# EAGLE board mapleCUx_large_047 (EAGLE 7.3.0)
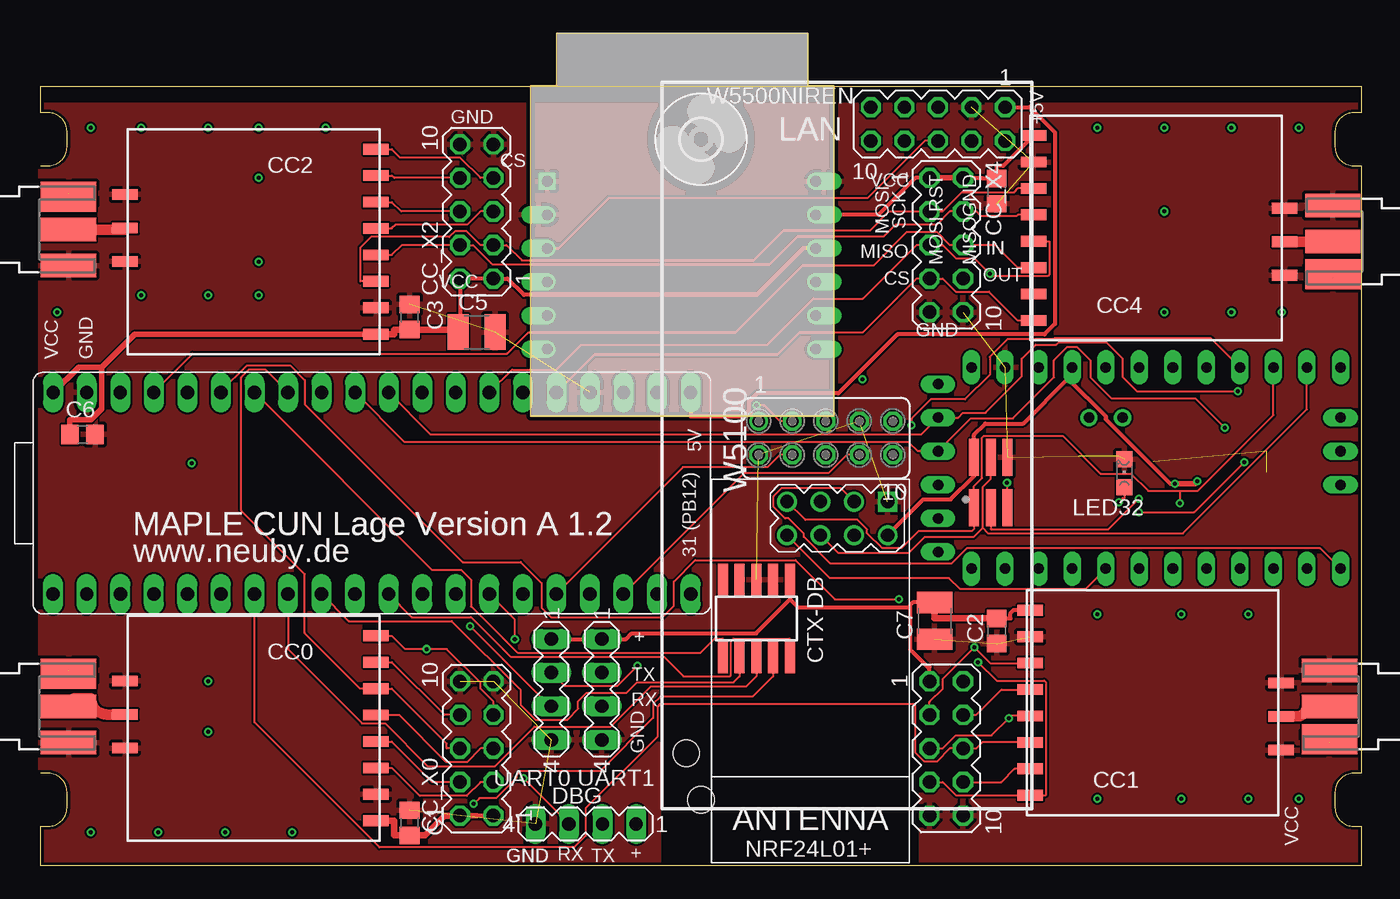
[diagram p0: board, top side]
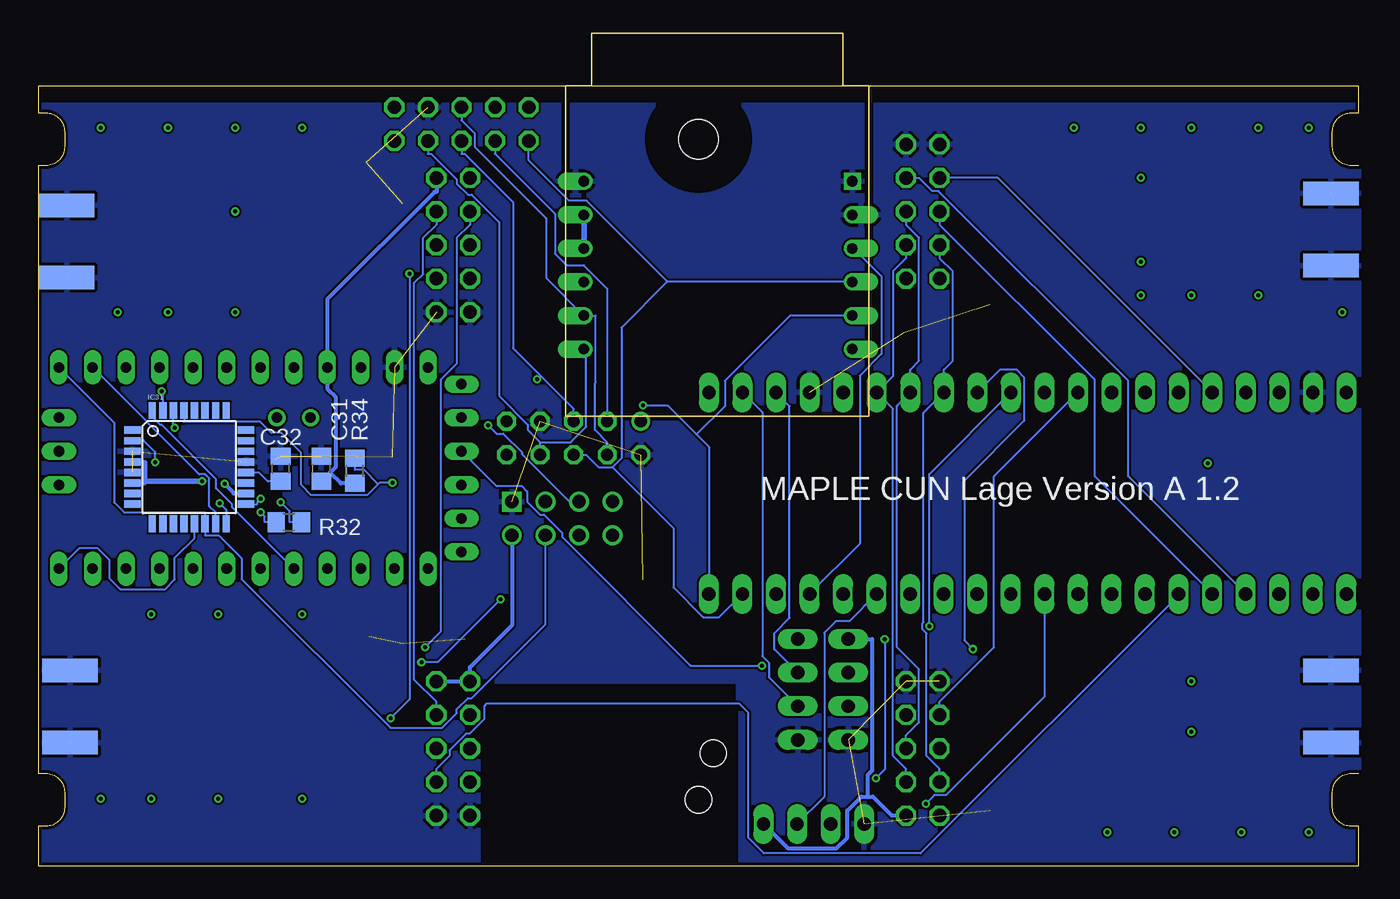
[diagram p1: board, bottom side, seen from below]

Size 100 x 63.04 mm. Coordinates in mm from the lower left corner, seen from the top.
Outline: 0,7 0.59,7 arc-90 2,5.59 2,4.41 arc-90 0.59,3 0,3 0,0 100,0 100,3 99.41,3 arc-90 98,4.41 98,5.59 arc-90 99.41,7 100,7 100,53 99.41,53 arc-90 98,54.41 98,55.59 arc-90 99.41,57 100,57 100,59 0,59 0,57 0.59,57 arc-90 2,55.59 2,54.41 arc-90 0.59,53 0,53
Copper layers (1*16): Top 0.035mm / dielectric 1.5mm / Bottom 0.035mm
Design rules "SeeedStudio_2layer_DRU_no_angle_20140221": minimum track width 6mil, minimum drill 12mil, track to track 6mil, track to pad 6mil, pad to pad 6mil, via to via 6mil, smd to smd 0mil, copper to edge 10mil, drill to drill 10mil, minimum pad ring 10mil, minimum via ring 6mil, stop-mask expansion 2mil, vias tented up to drill 100mil, thermal gap 10mil
Net classes: 1 PWR: width 0.508 mm
Holes 2 mm at 48.9,8.53 50,5
tRestrict: area 0,58 to 100,59; area 47,0 to 66,12
bRestrict: area 0,58 to 100,59; area 0,58 to 100,59; area 47,0 to 66,12

## Footprints (pad centres in the part's own frame; a part is rotated, then mirrored left to right if it is on the bottom)
C0805 = smd 1.3 x 1.5: 1 -0.95,0; 2 0.95,0
C1210 = smd 1.6 x 2.7: 1 -1.4,0; 2 1.4,0
CC1101_MODULE1_SMD = smd 1.93 x 0.813: ANT 19,5.96; CSN 0,0; GDO0 0,2; GDO2 0,4; GND@0 0,12; GND@1 19,8.5; GND@2 19,3.42; MISO 0,6; MOSI 0,10; SCLK 0,8; VCC 0,14
MA05-2 = drill 1.016 octagon: 1 -5.08,-1.27; 2 -5.08,1.27; 3 -2.54,-1.27; 4 -2.54,1.27; 5 0,-1.27; 6 0,1.27; 7 2.54,-1.27; 8 2.54,1.27; 9 5.08,-1.27; 10 5.08,1.27
1365-10 = smd 0.76 x 2.4: 1 -2.54,-2.95; 2 -2.54,2.95; 3 -1.27,-2.95; 4 -1.27,2.95; 5 0,-2.95; 6 0,2.95; 7 1.27,-2.95; 8 1.27,2.95; 9 2.54,-2.95; 10 2.54,2.95
MA04-1 = drill 1.016 long: 1 -3.81,0; 2 -1.27,0; 3 1.27,0; 4 3.81,0
3,0 = hole 3: 0,0
TQFP32-08 = smd 1.27 x 0.559: 1 -4.293,2.8; 2 -4.293,2; 3 -4.293,1.2; 4 -4.293,0.4; 5 -4.293,-0.4; 6 -4.293,-1.2; 7 -4.293,-2; 8 -4.293,-2.8; 17 4.293,-2.8; 18 4.293,-2; 19 4.293,-1.2; 20 4.293,-0.4; 21 4.293,0.4; 22 4.293,1.2; 23 4.293,2; 24 4.293,2.8 | smd 0.559 x 1.27: 9 -2.8,-4.293; 10 -2,-4.293; 11 -1.2,-4.293; 12 -0.4,-4.293; 13 0.4,-4.293; 14 1.2,-4.293; 15 2,-4.293; 16 2.8,-4.293; 25 2.8,4.293; 26 2,4.293; 27 1.2,4.293; 28 0.4,4.293; 29 -0.4,4.293; 30 -1.2,4.293; 31 -2,4.293; 32 -2.8,4.293
CHIPLED_0805 = smd 1.2 x 1.2: A 0,-1.05; C 0,1.05
WIRELESS-NRF24L01 = drill 1 square: 1 -12.7,6.35 | drill 1: 2 -10.16,6.35; 3 -12.7,3.81; 4 -10.16,3.81; 5 -12.7,1.27; 6 -10.16,1.27; 7 -12.7,-1.27; 8 -10.16,-1.27
R0805 = smd 1.3 x 1.5: 1 -0.95,0; 2 0.95,0
20-DIP = drill 1.016 pad 1.27 long: 1 -24.13,-7.62; 2 -21.59,-7.62; 3 -19.05,-7.62; 4 -16.51,-7.62; 5 -13.97,-7.62; 6 -11.43,-7.62; 7 -8.89,-7.62; 8 -6.35,-7.62; 9 -3.81,-7.62; 10 -1.27,-7.62; 11 1.27,-7.62; 12 3.81,-7.62; 13 6.35,-7.62; 14 8.89,-7.62; 15 11.43,-7.62; 16 13.97,-7.62; 17 16.51,-7.62; 18 19.05,-7.62; 19 21.59,-7.62; 20 24.13,-7.62 | drill 1 pad 1.27 long: 21 24.13,7.62; 22 21.59,7.62; 23 19.05,7.62; 24 16.51,7.62; 25 13.97,7.62; 26 11.43,7.62; 27 8.89,7.62; 28 6.35,7.62; 29 3.81,7.62; 30 1.27,7.62; 31 -1.27,7.62; 32 -3.81,7.62; 33 -6.35,7.62; 34 -8.89,7.62; 35 -11.43,7.62; 36 -13.97,7.62; 37 -16.51,7.62; 38 -19.05,7.62; 39 -21.59,7.62; 40 -24.13,7.62
ABK-PRO-MINI = drill 0.8 long: A0 10.16,-3.81; A1 10.16,-6.35; A2 10.16,-8.89; A3 10.16,-11.43; A6 3.81,-21.59; A7 6.35,-21.59; D2 -5.08,-3.81; D3 -5.08,-6.35; D4 -5.08,-8.89; D5 -5.08,-11.43; D6 -5.08,-13.97; D7 -5.08,-16.51; D8 -5.08,-19.05; D9 -5.08,-21.59; D10 10.16,-21.59; D11 10.16,-19.05; D12 10.16,-16.51; D13 10.16,-13.97; DTR 8.89,8.89; GND 10.16,3.81; GND1 -5.08,-1.27; GND2 -3.81,8.89; GND3 -1.27,8.89; GND4 1.27,-21.59; RAW 10.16,6.35; RST 10.16,1.27; RST1 -5.08,1.27; RX1 -5.08,3.81; RX1-1 3.81,8.89; TX0 -5.08,6.35; TX0-1 6.35,8.89; VCC 10.16,-1.27; VCC1 1.27,8.89 | drill 0.8: A4 6.35,-5.08; A5 6.35,-2.54
USR-ES1 = drill 0.8 square: GND 1.27,17.78 | drill 0.8 offset: GND2 1.27,15.24; GND3 21.59,17.78; MISO 21.59,5.08; MOSI 1.27,12.7; NINT 1.27,5.08; NRESET 21.59,7.62; NSS 1.27,7.62; PWDN 21.59,10.16; SCLK 1.27,10.16; VIN3.3 21.59,15.24; VIN3.3B 21.59,12.7
FE05-2 = drill 0.914: 1 -5.08,1.27 | drill 0.914 octagon: 2 -5.08,-1.27; 3 -2.54,1.27; 4 -2.54,-1.27; 5 0,1.27; 6 0,-1.27; 7 2.54,1.27; 8 2.54,-1.27; 9 5.08,1.27; 10 5.08,-1.27
SMA = smd 4.191 x 1.778: 1 2.115,0; GND@1 2.115,2.733; GND@2 2.115,-2.733 | smd 4.191 x 1.778 bottom: GND@3 2.115,2.733; GND@4 2.115,-2.733 | smd 4.191 x 2.286: P$3 2.108,2.489
2X03-1.27MM_SMD = smd 0.75 x 2.8: P$1 -1.27,-1.905; P$2 -1.27,1.905; P$3 0,-1.905; P$4 0,1.905; P$5 1.27,-1.905; P$6 1.27,1.905

## Placement (x,y rotation side)
C1  22pF  [C0805]  27.94,3.25 270 top
C2  22pF  [C0805]  72.39,17.78 90 top
C3  22pF  [C0805]  27.94,41.55 270 top
C4  22pF  [C0805]  72.39,51.07 90 top
C5  10uF  [C1210]  33.02,40.4 0 top
C6  22pF  [C0805]  3.17,32.66 0 top
C7  4,7  [C1210]  67.69,18.54 90 top
C31  100n  [C0805]  78.56,30.06 90 bottom
C32  100n  [C0805]  81.64,30.06 90 bottom
CC0  CC1101_MODULE1SMD  [CC1101_MODULE1_SMD]  25.4,17.41 180 top
CC1  CC1101_MODULE1SMD  [CC1101_MODULE1_SMD]  74.93,5.35 0 top
CC2  CC1101_MODULE1SMD  [CC1101_MODULE1_SMD]  25.4,54.24 180 top
CC4  CC1101_MODULE1SMD  [CC1101_MODULE1_SMD]  75.18,41.27 0 top
CC_X0  [MA05-2]  33.02,8.89 90 top
CC_X1  [MA05-2]  68.58,8.89 270 top
CC_X2  [MA05-2]  33.02,49.53 90 top
CC_X4  [MA05-2]  68.58,46.99 270 top
CTX-DB  1365-10  [1365-10]  54.19,18.73 180 top
DBG  [MA04-1]  41.27,3.17 180 top
H6  MOUNT-HOLE3.0  [3,0]  50,55 0 top
IC31  ATMEGA168-TQFP  [TQFP32-08]  88.56,30.18 0 bottom
LED32  [CHIPLED_0805]  82.06,29.72 0 top
NRF24L01+  NRF24L01+  [WIRELESS-NRF24L01]  57.78,14.88 270 top
R32  1k  [R0805]  81.02,26.02 0 bottom
R34  [R0805]  76.02,29.9 90 bottom
U$1  MAPLEMINI  [20-DIP]  25.08,28.21 0 top
U$2  ABK-PRO-MINI  [ABK-PRO-MINI]  76.83,27.57 90 top
U$3  USR-ES1  [USR-ES1]  37.08,34.04 0 top
UART0  [MA04-1]  38.66,13.36 270 top
UART1  [MA04-1]  42.49,13.36 270 top
W5100  [FE05-2]  59.45,32.38 0 top
W5500NIREN  [MA05-2]  67.94,56.15 180 top
X1  SMA  [SMA]  99.69,12.06 180 top
X2  SMA  [SMA]  0,12.06 0 top
X3  SMA  [SMA]  0,48.16 0 top
X4  SMA  [SMA]  99.95,47.26 180 top
X31  M03X2  [2X03-1.27MM_SMD]  71.94,29.02 0 top

## Library data of the parts
C1-C7 C31 C32 R32 R34 = rcl
CC0 CC1 CC2 CC4 = wireless
CC_X0 CC_X1 CC_X2 CC_X4 DBG UART0 UART1 W5500NIREN = con-lstb; OC_FARNELL: unknown; OC_NEWARK: unknown
CTX-DB = con-leotronics; OC_FARNELL: unknown; OC_NEWARK: unknown
H6 = holes
IC31 = atmel
LED32 = led
NRF24L01+ = diy-modules
U$1 = maplemini-small
U$2 = Arduino-clone
U$3 = Martin
W5100 = con-lsta; OC_FARNELL: unknown; OC_NEWARK: unknown
X1-X4 = sma
X31 = mechanics

## Nets
+5V [PWR]: U$1.21 W5100.1 W5500NIREN.1
CC_CS0: CC0.CSN CC_X0.7 U$1.29
CC_CS1: CC1.CSN CC_X1.7 U$1.35
CC_CS2: CC2.CSN CC_X2.7 U$1.4
CC_CS3: CC4.CSN CC_X4.7 U$1.25
CC_IN_0: CC0.GDO2 CC_X0.6 U$1.33
CC_IN_1: CC1.GDO2 CC_X1.6 U$1.7
CC_IN_2: CC2.GDO2 CC_X2.6 U$1.5
CC_IN_3: CC4.GDO2 CC_X4.6 U$1.37
CC_OUT_0: CC0.GDO0 CC_X0.8 U$1.32
CC_OUT_1: CC1.GDO0 CC_X1.8 U$1.6
CC_OUT_2: CC2.GDO0 CC_X2.8 U$1.36
CE-A: IC31.13 NRF24L01+.3 U$2.D9
CSN-A: IC31.14 NRF24L01+.4 U$2.D10
GND [PWR]: C1.1 C2.1 C3.1 C4.1 C5.2 C6.2 C7.1 C31.2 C32.2 CC0.GND@0 CC0.GND@1 CC0.GND@2 CC1.GND@0 CC1.GND@1 CC1.GND@2 CC2.GND@0 CC2.GND@1 CC2.GND@2 CC4.GND@0 CC4.GND@1 CC4.GND@2 CC_X0.9 CC_X0.10 CC_X1.9 CC_X1.10 CC_X2.9 CC_X2.10 CC_X4.9 CC_X4.10 CTX-DB.3 CTX-DB.5 DBG.4 IC31.3 IC31.5 IC31.21 LED32.C NRF24L01+.1 U$1.24 U$1.39 U$2.GND U$3.GND U$3.GND2 U$3.GND3 UART0.4 UART1.4 W5100.2 W5100.7 W5500NIREN.3 X1.GND@1 X1.GND@2 X1.GND@3 X1.GND@4 X2.GND@1 X2.GND@2 X2.GND@3 X2.GND@4 X3.GND@1 X3.GND@2 X3.GND@3 X3.GND@4 X4.GND@1 X4.GND@2 X4.GND@3 X4.GND@4 X31.P$6
IRQ-A: IC31.32 NRF24L01+.8 U$2.D2
M-RES: IC31.29 R34.2 X31.P$5
M-SCK: IC31.17 X31.P$3
MISO1: CC0.MISO CC1.MISO CC2.MISO CC4.MISO CC_X0.5 CC_X1.5 CC_X2.5 CC_X4.5 U$1.27
MISO2: U$1.18 U$3.MISO W5100.8 W5500NIREN.4
MISO-A: IC31.16 NRF24L01+.7 U$2.D12 X31.P$1
MOSI1: CC0.MOSI CC1.MOSI CC2.MOSI CC4.MOSI CC_X0.3 CC_X1.3 CC_X2.3 CC_X4.3 U$1.26
MOSI-A: IC31.15 NRF24L01+.6 U$2.D11 X31.P$4
N$1: CC2.ANT X3.1
N$2: CC4.ANT X4.1
N$3: CC1.ANT X1.1
N$4: CC0.ANT X2.1
N$5: LED32.A R32.2
N$8: CTX-DB.7
N$15: C32.1 IC31.20
N$46: U$3.NINT
N$49: U$3.PWDN
NC: CTX-DB.9
NRESET: CTX-DB.10 U$1.34
RST: U$1.17 U$3.MOSI W5100.5 W5500NIREN.6
RX1: U$1.22 UART1.3
RX-MAPLE: IC31.31 U$1.30 U$2.TX0-1 UART0.3
RX_DBG: DBG.3 U$1.14
RX_LED: IC31.2 R32.1
SCK1: CC0.SCLK CC1.SCLK CC2.SCLK CC4.SCLK CC_X0.4 CC_X1.4 CC_X2.4 CC_X4.4 U$1.28
SCK2: U$1.19 U$3.SCLK W5100.6 W5500NIREN.10
SCK-A: NRF24L01+.5 U$2.D13
SWCLK/TCK: CTX-DB.4 U$1.10
SWDIO/TMS: CTX-DB.2 U$1.11
SWO/TDO: CTX-DB.6 U$1.8
TDI: CTX-DB.8 U$1.9
TX1: U$1.23 UART1.2
TX-MAPLE: IC31.30 U$1.31 U$2.RX1-1 UART0.2
TX_DBG: DBG.2 U$1.15
VCC [PWR]: C1.2 C2.2 C3.2 C4.2 C5.1 C6.1 C7.2 C31.1 CC0.VCC CC1.VCC CC2.VCC CC4.VCC CC_X0.1 CC_X0.2 CC_X1.1 CC_X1.2 CC_X2.1 CC_X2.2 CC_X4.1 CC_X4.2 CTX-DB.1 DBG.1 IC31.4 IC31.6 IC31.18 NRF24L01+.2 R34.1 U$1.40 U$2.VCC U$3.VIN3.3 U$3.VIN3.3B UART0.1 UART1.1 X31.P$2
WIZ_CS: U$1.20 U$3.NSS W5100.3 W5500NIREN.8
WIZ_RST: U$1.16 U$3.NRESET W5100.4 W5500NIREN.5

## Tracks (layer width: path | path; a pad name or v marks a point on that pad's centre or on a via)
+5V
  Top 0.305: U$1.21 49.21,34.02 53.2,34.02 53.61,34.42 | 53.61,34.42 W5100.1 | W5500NIREN.1 74.89,57.42 76.8,55.51 76.8,41.02 76.02,40.23 64.88,40.23 60.4,35.76 54.25,35.76 53.61,35.12 53.61,34.42
CC_CS0  (via drill 0.3 pad 0.61)
  Top 0.152: CC_X0.7 34.29,12.42 33.3,13.41 33.3,13.86 30.75,16.41 v29.22,16.41 27.59,16.41 26.59,17.41 CC0.CSN
  Bottom 0.152: U$1.29 27.15,37.57 25.95,37.57 25.36,36.98 25.36,33.69 29.88,29.16 29.88,17.08 v29.22,16.41
CC_CS1  (via drill 0.3 pad 0.61)
  Top 0.152: v70.98,15.43 72.39,14.02 75.99,14.02 76.12,13.88 76.12,5.35 CC1.CSN 69.3,5.35 68.3,6.35 CC_X1.7 | U$1.35 13.65,35.91 15.63,37.89 18.89,37.89 20,36.77 20,34.94 31.95,22.99 36.34,22.99 37.94,21.39 37.94,19.54 38.64,18.84 47.1,18.84 47.94,19.68 47.94,21.52 49.56,23.14 57.17,23.14 60.13,20.18 v64.99,20.18
  Bottom 0.152: v64.99,20.18 69.75,15.43 v70.98,15.43
CC_CS2
  Top 0.152: CC2.CSN 26.59,54.24 27.23,53.61 31.76,53.61 33.3,52.07 CC_X2.7
  Bottom 0.152: CC_X2.7 33.3,52.07 32.31,51.08 31.82,51.08 17.46,36.72 17.46,29.48 U$1.4
CC_CS3
  Top 0.152: CC4.CSN 73.99,41.27 71.81,43.46 69.29,43.46 68.3,44.45 CC_X4.7 66.32,44.45 62.26,40.39 57.49,40.39 55.82,38.72 41.94,38.72 U$1.25
CC_IN_0
  Top 0.152: CC_X0.6 30.76,8.89 30.76,9.25 26.59,13.41 CC0.GDO2 24.21,13.41 20,17.62 20,22.08 15.2,26.88 15.2,36.98 15.79,37.58 16.99,37.58 U$1.33
CC_IN_1
  Top 0.152: U$1.7 16.19,10.87 25.65,1.41 40.41,1.41 41.27,2.27 41.27,4.35 46.7,9.77 46.7,12.06 46.86,12.23 66.16,12.23 66.23,12.16 66.23,8.57 66.9,7.9 67.87,7.9 68.86,8.89 CC_X1.6 70.84,8.89 71.3,9.35 CC1.GDO2
CC_IN_2
  Top 0.152: CC2.GDO2 26.59,50.24 27.31,49.53 CC_X2.6
  Bottom 0.152: CC_X2.6 31.75,48.54 20,36.79 20,29.48 U$1.5
CC_IN_3
  Top 0.152: U$1.37 11.51,38.77 35.31,38.77 36.93,40.39 52.61,40.39 57.69,45.47 63.09,45.47 65.6,47.98 67.87,47.98 68.86,46.99 CC_X4.6 72.28,46.99 73.99,45.27 CC4.GDO2
CC_OUT_0
  Top 0.152: CC0.GDO0 26.59,15.41 30.58,11.43 CC_X0.8
  Bottom 0.152: CC_X0.8 31.75,12.42 27.62,16.55 27.62,29.48 U$1.32
CC_OUT_1
  Top 0.152: CC1.GDO0 73.74,7.35 72.74,6.35 CC_X1.8
  Bottom 0.152: CC_X1.8 69.85,7.34 68.86,8.33 68.86,8.75 67.6,10.01 67.33,10.01 66.23,11.11 66.23,12.1 66.07,12.26 46.88,12.26 46.23,11.6 46.23,2.13 45.05,0.96 33.18,0.96 13.65,20.49 U$1.6
CC_OUT_2
  Top 0.152: CC2.GDO0 26.59,52.24 26.77,52.07 CC_X2.8
  Bottom 0.152: U$1.36 27.35,52.07 CC_X2.8
CE-A
  Top 0.152: U$2.D9 96.89,24.03 70.12,24.03 68.96,22.88 59.81,22.88 57.78,24.9 57.78,25.16 56.63,26.3 56.38,26.3 55.5,27.18 55.5,27.96 56.15,28.61 60.56,28.61 NRF24L01+.3
  Bottom 0.152: U$2.D9 96.84,24.08 95.53,24.08 94.61,23.16 94.61,21.79 93.78,20.95 90.38,20.95 89.64,21.69 89.64,23.33 88.16,24.82 IC31.13
CSN-A
  Bottom 0.152: U$2.D10 94.25,33.55 94.25,27.51 93.49,26.75 87.36,26.75 IC31.14 87.36,25.02 86.35,25.02 84.59,23.27 84.59,21.71 73.32,10.44 69.42,10.44 68.3,11.56 68.3,11.86 67.46,12.7 67.17,12.7 61.59,18.28 NRF24L01+.4
GND  (24 unrouted)
  pour Bottom: 0,59 0,0 46.99,0 46.99,13.97 66.67,13.97 66.67,0 100,0 100,59
  pour Top: 0,0 0,59 100,59 100,0 66.67,0 66.67,13.97 46.99,13.97 46.99,0
IRQ-A
  Top 0.152: U$2.D2 79.09,20.94 69.63,20.94 68.78,21.79 59.76,21.79 NRF24L01+.8
  Bottom 0.152: U$2.D2 85.31,27.16 85.31,27.36 86.52,28.58 86.52,29.27 90.63,33.37 90.74,33.37 91.36,33.99 IC31.32
M-RES  (via drill 0.3 pad 0.61)
  Top 0.152: X31.P$5 73.21,28.74 73.18,28.77 v73.18,29.01
  Bottom 0.152: 74.25,28.9 75.08,28.07 79.31,28.07 80.1,28.86 80.1,31.26 81.61,32.78 82.35,32.78 83.19,33.61 88.96,33.61 IC31.29 | v73.18,29.01 74.14,29.01 74.25,28.9 | 74.25,28.9 75.32,29.97 76.02,29.97 R34.2
M-SCK  (via drill 0.3 pad 0.61)
  Top 0.152: X31.P$3 71.94,25.49 80.86,25.49 v83.15,27.78
  Bottom 0.152: IC31.17 83.4,27.38 83.4,27.52 v83.15,27.78
MISO1  (via drill 0.3 pad 0.61)
  Top 0.152: CC_X0.5 33.3,8.89 32.27,7.86 30.72,7.86 27.17,11.41 CC0.MISO | CC2.MISO 26.59,48.24 26.89,48.54 32.31,48.54 33.3,49.53 CC_X2.5 | CC4.MISO 76.38,47.27 76.38,44.77 76.25,44.64 72.06,44.64 v71.89,44.8 70.7,46 69.29,46 68.3,46.99 CC_X4.5 66.32,46.99 62.26,42.93 58.48,42.93 54.98,39.43 40.9,39.43 39.04,37.57 35.71,37.57 U$1.27 | CC_X1.5 68.3,8.89 69.29,9.88 72,9.88 v73.31,11.19 73.47,11.35 CC1.MISO
  Bottom 0.152: CC_X2.5 34.29,48.54 33.3,47.55 33.3,38.24 33.97,37.57 U$1.27 34.98,34.83 34.98,16.54 33.3,14.87 33.3,10.87 34.29,9.88 CC_X0.5 | v71.89,44.8 71.89,12.6 v73.31,11.19
MISO2
  Top 0.152: W5100.8 61.05,31.11 59.71,29.77 53.31,29.77 U$1.18
  Bottom 0.152: 61.99,32.05 59.69,32.05 58.5,33.24 58.5,38.95 U$3.MISO | 61.99,32.05 61.99,31.98 W5100.8 | W5500NIREN.4 70.48,53.89 70.24,53.89 68.3,51.95 68.3,51.64 67.46,50.8 67.17,50.8 65.1,48.72 65.1,35.57 62.93,33.4 62.93,32.99 61.99,32.05
MISO-A  (via drill 0.3 pad 0.61)
  Top 0.152: NRF24L01+.7 57.89,26.2 61.86,26.2 62.58,25.48 62.58,25.19 63.72,24.05 65.19,24.05 66.47,25.33 70.51,25.33 70.67,25.49 X31.P$1 70.67,27.31 70.67,28.74 71.27,29.35 71.27,32.41 71.41,32.55 77.38,32.55 80.24,29.69 82.56,29.69 83.87,28.39 86.24,28.39 | 86.24,28.39 87.61,28.39 93.34,34.12 U$2.D12 | 86.24,28.39 v86.24,27.45
  Bottom 0.152: v86.24,27.45 85.76,26.97 IC31.16
MOSI1  (via drill 0.3 pad 0.61)
  Top 0.152: CC_X1.3 67.31,12.42 68.3,13.41 68.3,14.15 v70.7,16.55 71.9,15.35 CC1.MOSI | CC2.MOSI 24.21,44.24 24.21,46.8 25.01,47.61 30.95,47.61 31.37,48.03 32.26,48.03 33.3,46.99 CC_X2.3 35.28,46.99 36.45,45.82 53.97,45.82 56.26,48.11 62.82,48.11 64.24,49.53 CC_X4.3 68.3,49.53 69.77,51 73.71,51 73.99,51.27 CC4.MOSI | CC0.MOSI 26.59,7.42 28.7,5.31 32.26,5.31 33.3,6.35 CC_X0.3
  Bottom 0.152: CC_X4.3 67.31,48.54 68.3,47.55 68.3,38.02 69.53,36.79 69.53,17.73 v70.7,16.55 | CC_X0.3 34.29,7.34 35.28,8.33 35.28,34.6 U$1.26 35.28,37.06 35.28,45.01 34.29,46 CC_X2.3
MOSI-A
  Top 0.152: 71.34,25.58 70.63,24.88 66.92,24.88 65.72,23.67 60.42,23.67 NRF24L01+.6 | 71.34,25.58 71.74,25.18 86.5,25.18 95.89,34.56 U$2.D11 | 71.34,25.58 71.34,28.69 71.94,29.3 X31.P$4
  Bottom 0.152: IC31.15 86.56,26.75 87.04,27.23 87.04,29.32 87.36,29.64 87.79,29.64 U$2.D11
N$1
  Top 0.813: X3.1 6.4,48.16 CC2.ANT
N$2
  Top 0.813: CC4.ANT 97.81,47.23 arc90 X4.1
N$3
  Top 0.813: CC1.ANT 95.13,11.31 arc90 95.89,12.06 X1.1
N$4
  Top 0.813: CC0.ANT 5.05,11.46 arc-90 3.81,12.7 2.75,12.7 arc90 X2.1
N$5  (via drill 0.3 pad 0.61)
  Top 0.152: LED32.A 82.06,27.84 81.94,27.84 v81.63,27.54
  Bottom 0.152: R32.2 80.95,26.02 80.95,26.86 v81.63,27.54
N$6  (via drill 0.3 pad 0.61)
  other vias: 3.81,55.88
N$7  (via drill 0.3 pad 0.61)
  other vias: 1.27,41.91
N$9  (via drill 0.3 pad 0.61)
  other vias: 3.81,2.54
N$10  (via drill 0.3 pad 0.61)
  other vias: 8.89,2.54
N$11  (via drill 0.3 pad 0.61)
  other vias: 13.97,2.54
N$12  (via drill 0.3 pad 0.61)
  other vias: 19.05,2.54
N$13  (via drill 0.3 pad 0.61)
  other vias: 7.62,55.88
N$14  (via drill 0.3 pad 0.61)
  other vias: 12.7,55.88
N$15
  Bottom 0.152: C32.1 82.62,29.11 83.29,29.78 IC31.20
N$16  (via drill 0.3 pad 0.61)
  other vias: 95.25,55.88
N$17  (via drill 0.3 pad 0.61)
  other vias: 90.17,55.88
N$18  (via drill 0.3 pad 0.61)
  other vias: 85.09,55.88
N$19  (via drill 0.3 pad 0.61)
  other vias: 80.01,55.88
N$20  (via drill 0.3 pad 0.61)
  other vias: 85.09,41.91
N$21  (via drill 0.3 pad 0.61)
  other vias: 86.36,19.05
N$22  (via drill 0.3 pad 0.61)
  other vias: 95.25,5.08
N$23  (via drill 0.3 pad 0.61)
  other vias: 91.44,5.08
N$24  (via drill 0.3 pad 0.61)
  other vias: 90.17,41.91
N$25  (via drill 0.3 pad 0.61)
  other vias: 80.01,5.08
N$26  (via drill 0.3 pad 0.61)
  other vias: 62.23,36.83
N$27  (via drill 0.3 pad 0.61)
  other vias: 16.51,45.72
N$28  (via drill 0.3 pad 0.61)
  other vias: 12.7,13.97
N$29  (via drill 0.3 pad 0.61)
  other vias: 11.43,30.48
N$30  (via drill 0.3 pad 0.61)
  other vias: 85.09,49.53
N$31  (via drill 0.3 pad 0.61)
  other vias: 80.01,19.05
N$32  (via drill 0.3 pad 0.61)
  other vias: 86.36,5.08
N$33  (via drill 0.3 pad 0.61)
  other vias: 91.44,19.05
N$35  (via drill 0.3 pad 0.61)
  other vias: 16.51,43.18
N$36  (via drill 0.3 pad 0.61)
  other vias: 21.59,55.88
N$37  (via drill 0.3 pad 0.61)
  other vias: 16.51,55.88
N$38  (via drill 0.3 pad 0.61)
  other vias: 12.7,10.16
N$39  (via drill 0.3 pad 0.61)
  other vias: 93.98,41.91
N$40  (via drill 0.3 pad 0.61)
  other vias: 16.51,52.07
N$41  (via drill 0.3 pad 0.61)
  other vias: 12.7,43.18
N$42  (via drill 0.3 pad 0.61)
  other vias: 7.62,43.18
NRESET
  Top 0.152: CTX-DB.10 51.65,17.2 51.04,17.2 49.97,16.13 36.1,16.13 32.59,19.64 32.59,21.66 31.85,22.4 29.62,22.4 U$1.34
RST
  Top 0.152: U$3.MOSI 39.24,46.74 43.05,50.55 62.62,50.55 66.95,54.88 W5500NIREN.6
  Bottom 0.152: W5100.5 59.45,34.59 64.04,39.19 64.04,50.23 67.7,53.89 67.94,53.89 W5500NIREN.6 | U$3.MOSI 38.26,46.74 36.14,44.62 36.14,38.75 37.78,37.11 37.78,24.4 U$1.17
RX1
  Bottom 0.152: U$1.22 45.16,34.32 45.16,15.88 44.67,15.38 44.67,14.26 UART1.3
RX-MAPLE  (via drill 0.3 pad 0.61)
  Top 0.152: v90.65,35.92 83.02,35.92 81.92,37.03 81.92,38.41 80.7,39.63 77.08,39.63 76.9,39.45 75.34,39.45 74.3,38.4 74.3,37.05 71.54,34.29 69.85,34.29 69.48,33.92 U$2.TX0-1 66.7,32.68 29.5,32.68 U$1.30 | UART0.3 38.58,12.09 v32.52,18.14
  Bottom 0.152: v90.65,35.92 90.56,35.83 IC31.31 | v32.52,18.14 32.52,29.66 U$1.30
RX_DBG  (via drill 0.3 pad 0.61)
  Top 0.152: v36.57,6.64 40.01,3.2 DBG.3 | U$1.14 35.91,18.66 v35.91,17.14
  Bottom 0.152: v35.91,17.14 35.91,7.3 v36.57,6.64
RX_LED  (via drill 0.3 pad 0.61)
  Top 0.152: v83.16,26.77 87.34,26.77 v91.13,30.56
  Bottom 0.152: R32.1 82.85,26.02 82.85,26.46 v83.16,26.77 | IC31.2 91.99,32.18 91.13,31.32 v91.13,30.56
SCK1
  Top 0.152: CC_X1.4 70.84,11.43 72.76,13.35 CC1.SCLK | CC0.SCLK 26.59,9.41 29.66,6.35 CC_X0.4 | CC4.SCLK 73.99,49.27 73.93,49.21 71.16,49.21 70.84,49.53 CC_X4.4 68.86,49.53 67.87,48.54 64.74,48.54 63.82,47.62 57.28,47.62 55.17,45.51 34.22,45.51 32.74,46.99 CC_X2.4 27.34,46.99 26.59,46.24 CC2.SCLK
  Bottom 0.152: CC_X1.4 69.85,12.42 71.52,14.09 71.52,44.12 70.84,44.8 70.84,47.55 69.85,48.54 CC_X4.4 | CC_X0.4 31.75,7.34 32.74,8.33 32.74,17.6 33.06,17.92 33.06,18.36 32.97,18.45 32.97,34.29 U$1.28 31.43,37.57 30.76,38.24 30.76,45.01 31.75,46 CC_X2.4
SCK2
  Bottom 0.152: W5100.6 58.51,31.11 57.57,30.18 56.52,30.18 | 56.52,30.18 51.9,25.56 51.9,21.09 49.65,18.83 48.43,18.83 U$1.19 | 52.39,44.2 55.84,40.74 55.84,30.85 56.52,30.18 | 52.39,44.2 52.39,44.27 58.48,50.36 59.8,50.36 62.87,53.43 W5500NIREN.10 | U$3.SCLK 52.39,44.2
SCK-A  (via drill 0.3 pad 0.61)
  Top 0.152: U$2.D13 88.59,39.95 76.77,39.95 76.68,39.85 73.18,39.85 71.86,38.53 71.86,37.17 70,35.3 67.4,35.3 65.94,33.84 v65.94,33.35
  Bottom 0.152: v65.94,33.35 65.3,32.72 64.78,32.72 63.37,31.3 63.37,31.16 59.78,27.57 NRF24L01+.5
SWCLK/TCK  (via drill 0.3 pad 0.61)
  Top 0.152: v32.8,4.71 33.22,5.14 34.48,5.14 36.03,6.69 36.03,6.86 36.34,7.17 42.36,7.17 46.39,11.2 46.39,12.27 46.92,12.8 53.92,12.8 55.46,14.35 CTX-DB.4
  Bottom 0.152: U$1.10 23.81,12.81 31.27,5.36 32.15,5.36 v32.8,4.71
SWDIO/TMS
  Top 0.152: CTX-DB.2 56.73,17.2 52.45,17.2 52.27,17.03 52.27,14.44 52.17,14.35 48.66,14.35 47.18,15.82 35.59,15.82 32.58,18.84 28.11,18.84 U$1.11
SWO/TDO
  Top 0.152: CTX-DB.6 54.19,14.35 53.44,13.59 46.22,13.59 43.17,10.54 37.4,10.54 34.41,7.56 29.3,7.56 26.08,10.78 24.34,10.78 18.73,16.39 U$1.8
TDI
  Top 0.152: CTX-DB.8 52.92,14.35 52.47,13.9 45.17,13.9 44.36,13.1 41.33,13.1 40.7,12.47 40.7,11.9 39.88,11.08 37.47,11.08 36.34,12.21 36.34,13.32 31.13,18.53 23.33,18.53 U$1.9
TX1
  Bottom 0.152: UART1.2 44.26,16.4 44.26,17.61 43.1,18.77 43.1,34.8 U$1.23
TX-MAPLE  (via drill 0.3 pad 0.61)
  Top 0.152: UART0.2 39.66,13.63 43.67,13.63 v45.2,15.16 | v89.67,33.16 87.44,35.39 81.09,35.39 79.49,36.98 79.49,38.26 78.46,39.29 77.75,39.29 76.73,38.27 76.73,36.97 73.62,33.86 70.42,33.86 U$2.RX1-1 67.84,31.39 66.41,31.39 65.72,32.07 27.57,32.07 U$1.31
  Bottom 0.152: U$2.RX1-1 65.31,28.75 63.41,28.75 62.97,28.32 62.97,27.55 62.01,26.59 61.71,26.59 60.33,25.21 60.33,24.89 50.59,15.16 v45.2,15.16 | v89.67,33.16 89.76,33.26 IC31.30
TX_DBG
  Bottom 0.152: U$1.15 38.58,18.52 39.58,18.52 40.47,17.63 40.47,5.25 DBG.2
VCC  (via drill 0.3 pad 0.61)
  Top 0.305: 65.85,19.57 65.85,19.75 66.04,19.94 C7.2 | 65.85,19.57 65.85,16.36 67.18,15.04 67.31,15.04 CC_X1.1 | 56.73,20.17 57.33,19.57 65.85,19.57 | 31.81,3.81 CC_X0.2 | C2.2 73.44,18.73 73.44,19.14 73.66,19.35 CC1.VCC | C5.1 31.62,40.59 31.62,40.72 | 31.62,40.72 31.75,40.85 CC_X2.2 CC_X2.1 35.36,44.45 36.59,43.21 54.19,43.21 57.72,46.74 U$3.VIN3.3B | NRF24L01+.2 66.84,27.74 68.9,27.74 70.67,29.51 X31.P$2 70.67,32.63 71.52,33.48 74.4,33.48 77.79,36.87 | 56.73,20.17 54.17,17.61 44.76,17.61 44.32,17.16 UART1.1 UART0.1 | CTX-DB.1 56.73,20.17 | CC4.VCC 72.88,52.98 72.39,52.98 C4.2 71.33,52.02 71.28,52.07 70.24,52.07 | CC_X4.1 66.24,52.07 63.45,49.28 U$3.VIN3.3 | CC_X0.1 33.02,3.81 | 77.79,36.87 77.79,37.42 U$2.VCC | 77.79,36.87 80.64,34.02 80.64,33.82 85.54,28.92 85.71,28.92
  Top 0.406: C6.1 2.23,33.76 3.79,33.76 4.64,34.61 4.64,37.75 | CC2.VCC 7.13,40.24 4.64,37.75 | 4.64,37.75 2.87,37.75 U$1.40 | 33.02,3.81 31.81,3.81 | 70.24,52.07 CC_X4.2 CC_X4.1 | 85.71,28.92 v85.88,28.92 87.39,28.92 v87.58,29.11
  Top 0.508: CC_X0.2 30.58,3.81 29.1,2.33 29.1,2.31 C1.2 26.78,2.31 26.78,3.4 26.77,3.42 CC0.VCC | C2.2 71.23,18.73 67.69,18.73 C7.2 | 31.62,40.59 29.1,40.59 C3.2 26.78,40.59 26.78,40.26 26.77,40.24 CC2.VCC | 31.62,40.72
  Bottom 0.305: 37.18,5.25 36.8,5.25 35.36,3.81 CC_X0.1 | DBG.1 43.25,1.34 39.54,1.34 38.73,2.15 38.73,4.19 37.67,5.25 37.18,5.25 | 37.18,5.25 37.18,6.89 36.84,7.23 36.84,17.16 UART0.1 | IC31.6 91.91,28.98 91.91,29.11 91.91,30.58 IC31.4 | CC_X4.2 69.85,51 69.98,51 78.11,42.88 U$2.VCC 78.11,36.12 77.49,35.51 77.49,30.18 77.9,29.77 | IC31.18 85.21,28.18 85.21,28.26 v85.88,28.92 | 77.9,29.77 C31.1 | R34.1 77.08,28.95 77.9,29.77 | NRF24L01+.2 64.14,18.21 67.31,15.04 CC_X1.1 CC_X1.2
  Bottom 0.406: U$3.VIN3.3 U$3.VIN3.3B | v87.58,29.11 91.91,29.11
WIZ_CS  (via drill 0.3 pad 0.61)
  Top 0.152: W5100.3 55.97,33.66 54.77,34.86 v54.22,34.86
  Bottom 0.152: 50.16,32.66 49.21,31.71 U$1.20 | U$3.NSS 43.06,41.66 48.01,36.71 48.01,34.81 50.16,32.66 | v54.22,34.86 52.37,34.86 50.16,32.66 | W5500NIREN.8 65.41,53.89 60.87,49.35 60.87,46.34 59.99,45.47 58.69,45.47 56.91,43.69 W5100.3
WIZ_RST
  Top 0.152: W5100.4 55.97,31.11 55.03,30.18 48.64,30.18 U$1.16
  Bottom 0.152: W5500NIREN.5 67.94,56.43 66.95,55.44 66.95,54.45 61.54,49.03 61.54,44.5 58.69,41.66 U$3.NRESET 57.79,41.66 57.79,36.58 57.85,36.52 57.85,32.99 56.91,32.05 W5100.4

## Text on the board
tNames: +5V | GND | LAN | CS | RST | GND | VCC | MOSI | MISO | MOSI | SCK | MISO | IN | VCC | CS | OUT | GND | VCC | GND | W5100 | 5V | MAPLE CUN Lage Version A 1.2 | MAPLE CUN Lage Version A 1.2 | www.neuby.de | 31 (PB12) | + | TX | RX | GND | VCC | GND | GND | + | RX | TX
bNames: MAPLE CUN Lage Version A 1.2